# EAGLE board stm32f405rgt6 v75 (EAGLE 9.7.0)
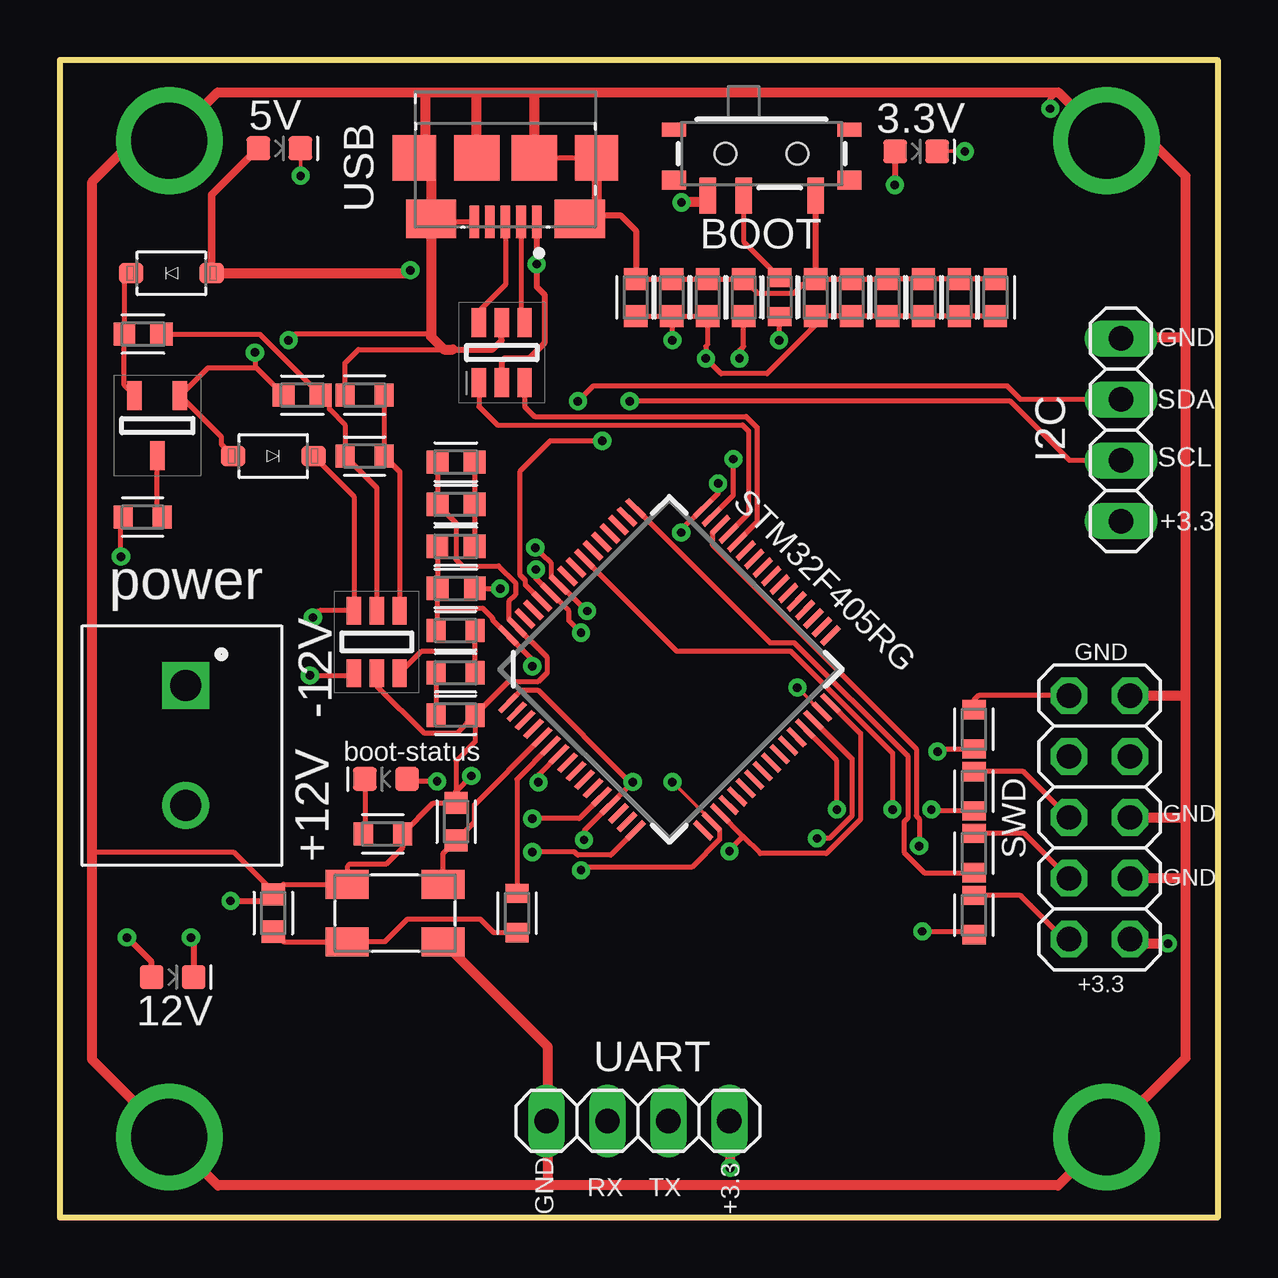
[diagram p0: board, top side]
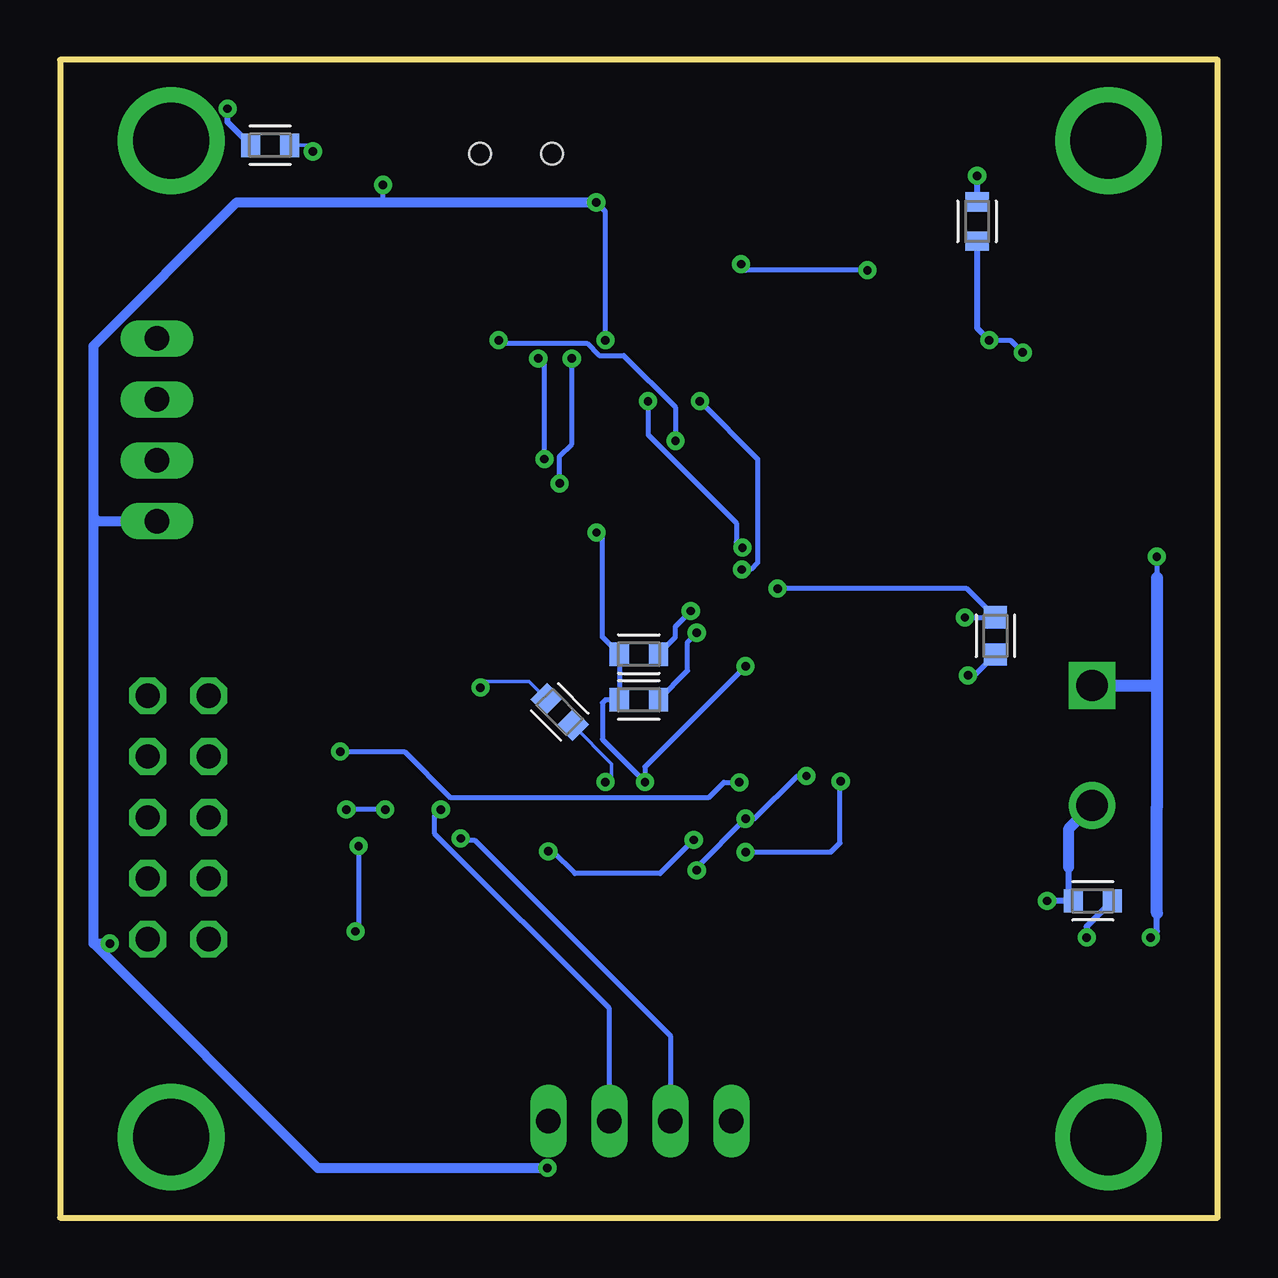
[diagram p1: board, bottom side, seen from below]

Size 48.26 x 48.26 mm. Coordinates in mm from the lower left corner, seen from the top.
Outline: 0,0 0,48.26 48.26,48.26 48.26,0 0,0
Copper layers (1*16): Top 0.035mm / dielectric 1.5mm / Bottom 0.035mm
Design rules "default *": minimum track width 6mil, minimum drill 0.35mm, track to track 6mil, track to pad 6mil, pad to pad 6mil, via to via 6mil, smd to smd 6mil, copper to edge 20mil, drill to drill 6mil, minimum pad ring 10mil, minimum via ring 8mil, stop-mask expansion 4mil, vias tented up to drill 0mil, thermal gap 10mil

## Footprints (pad centres in the part's own frame; a part is rotated, then mirrored left to right if it is on the bottom)
CAPC1608X85 = smd 0.921 x 0.97: 1 -0.775,0; 2 0.775,0
LED-0603 = smd 1 x 1: A -0.877,0; C 0.877,0
SOD-123 = smd 1.02 x 0.86: A 1.68,0; C -1.68,0
FUSC1608X60N = smd 0.799 x 0.974: 1 -0.815,0; 2 0.815,0
BEADC1608X95N = smd 0.9 x 0.97: 1 -0.785,0 | smd 0.933 x 0.97: 2 0.769,0
SOT95P280X100-6N = smd 1.15 x 0.6: 1 -1.3,0.95; 2 -1.3,0; 3 -1.3,-0.95; 4 1.3,-0.95; 5 1.3,0; 6 1.3,0.95
SOT95P280X145-6N = smd 1.2 x 0.6: 1 -1.25,0.95; 2 -1.25,0; 3 -1.25,-0.95; 4 1.25,-0.95; 5 1.25,0; 6 1.25,0.95
PHOENIX_1935161 = drill 1.3 square: 1 -2.5,0 | drill 1.3: 2 2.5,0
AMPHENOL_10118192-0001LF = smd 0.4 x 1.35: 1 -1.3,0; 2 -0.65,0; 3 0,0; 4 0.65,0; 5 1.3,0 | smd 2.1 x 1.6: SH1 -3.1,-0.125; SH2 3.1,-0.125 | smd 1.8 x 1.9: SH3 -3.8,-2.675; SH6 3.8,-2.675 | smd 1.9 x 1.9: SH4 -1.2,-2.675; SH5 1.2,-2.675
2X05 = drill 1.016 octagon: 1 -5.08,-1.27; 2 -5.08,1.27; 3 -2.54,-1.27; 4 -2.54,1.27; 5 0,-1.27; 6 0,1.27; 7 2.54,-1.27; 8 2.54,1.27; 9 5.08,-1.27; 10 5.08,1.27
1X04 = drill 1.016 long: 1 -3.81,0; 2 -1.27,0; 3 1.27,0; 4 3.81,0
INDC1608X95N = smd 0.9 x 0.97: 1 -0.785,0 | smd 0.933 x 0.97: 2 0.769,0
BEAGLEBONEBLACK_MOUNTING_HOLE = drill 3.175 pad 4.445: P$1 0,0
SOT95P280X125-3N = smd 1.2 x 0.6: 1 -1.25,0.95; 2 -1.25,-0.95; 3 1.25,0
RESC1608X60 = smd 0.799 x 0.974: 1 -0.815,0; 2 0.815,0
SWITCH_SPST_SMD_A = smd 0.7 x 1.5: 1 -2.25,-1.75; 2 -0.75,-1.75; 3 2.25,-1.75 | smd 1 x 0.6: GND1 -3.65,1; GND3 3.65,1 | smd 1 x 0.8: GND2 -3.65,-1.1; GND4 3.65,-1.1 | hole 0.9: -1.5,0; 1.5,0
TQFP64 = smd 0.22 x 1: 1 -3.75,-5.75; 2 -3.25,-5.75; 3 -2.75,-5.75; 4 -2.25,-5.75; 5 -1.75,-5.75; 6 -1.25,-5.75; 7 -0.75,-5.75; 8 -0.25,-5.75; 9 0.25,-5.75; 10 0.75,-5.75; 11 1.25,-5.75; 12 1.75,-5.75; 13 2.25,-5.75; 14 2.75,-5.75; 15 3.25,-5.75; 16 3.75,-5.75; 33 3.75,5.75; 34 3.25,5.75; 35 2.75,5.75; 36 2.25,5.75; 37 1.75,5.75; 38 1.25,5.75; 39 0.75,5.75; 40 0.25,5.75; 41 -0.25,5.75; 42 -0.75,5.75; 43 -1.25,5.75; 44 -1.75,5.75; 45 -2.25,5.75; 46 -2.75,5.75; 47 -3.25,5.75; 48 -3.75,5.75 | smd 1 x 0.22: 17 5.75,-3.75; 18 5.75,-3.25; 19 5.75,-2.75; 20 5.75,-2.25; 21 5.75,-1.75; 22 5.75,-1.25; 23 5.75,-0.75; 24 5.75,-0.25; 25 5.75,0.25; 26 5.75,0.75; 27 5.75,1.25; 28 5.75,1.75; 29 5.75,2.25; 30 5.75,2.75; 31 5.75,3.25; 32 5.75,3.75; 49 -5.75,3.75; 50 -5.75,3.25; 51 -5.75,2.75; 52 -5.75,2.25; 53 -5.75,1.75; 54 -5.75,1.25; 55 -5.75,0.75; 56 -5.75,0.25; 57 -5.75,-0.25; 58 -5.75,-0.75; 59 -5.75,-1.25; 60 -5.75,-1.75; 61 -5.75,-2.25; 62 -5.75,-2.75; 63 -5.75,-3.25; 64 -5.75,-3.75
ABM3B-16.000MHZ-B2-T = smd 1.8 x 1.2: 1 -2,-1.2; 2 2,-1.2; 3 2,1.2; 4 -2,1.2

## Placement (x,y rotation side)
C1  [CAPC1608X85]  27.43,21.08 315 bottom
C2  [CAPC1608X85]  28.5,38.35 90 top
C3  [CAPC1608X85]  34.49,38.35 90 top
C4  [CAPC1608X85]  35.99,38.35 90 top
C5  [CAPC1608X85]  37.49,38.35 90 top
C6  [CAPC1608X85]  38.99,38.35 90 top
C7  [CAPC1608X85]  27,38.35 90 top
C8  [CAPC1608X85]  31.5,38.35 90 top
C9  [CAPC1608X85]  16.51,31.5 180 top
C10  [CAPC1608X85]  16.51,29.74 180 top
C11  [CAPC1608X85]  16.51,16.51 90 top
C12  [CAPC1608X85]  8.89,12.7 90 top
C13  [CAPC1608X85]  10.1,34.29 180 top
C14  [CAPC1608X85]  9.27,24.26 90 bottom
C15  [CAPC1608X85]  24,38.35 90 top
C16  [CAPC1608X85]  25.5,38.35 90 top
C17  [CAPC1608X85]  33,38.35 90 top
D1  [LED-0603]  13.59,18.29 180 top
D2  [SOD-123]  8.89,31.75 180 top
D3  [SOD-123]  4.65,39.37 0 top
D4  [LED-0603]  4.7,10.03 0 top
D5  [LED-0603]  35.69,44.45 0 top
D6  [LED-0603]  9.14,44.58 0 top
F1  [FUSC1608X60N]  3.45,29.21 180 top
FB1  [BEADC1608X95N]  3.47,36.83 0 top
IC1  [SOT95P280X100-6N]  13.21,24 90 top
IC2  [SOT95P280X145-6N]  18.41,36.07 270 top
J1  1935161  [PHOENIX_1935161]  5.24,19.69 270 top
J3  [AMPHENOL_10118192-0001LF]  18.57,41.51 180 top
JP1  [2X05]  43.33,16.69 90 top
JP2  [1X04]  24.09,4.04 180 top
JP3  [1X04]  44.22,32.84 90 top
L1  [INDC1608X95N]  16.51,27.98 0 top
L2  [INDC1608X95N]  16.51,26.23 180 top
MGT1  [BEAGLEBONEBLACK_MOUNTING_HOLE]  43.62,44.89 0 top
MGT2  [BEAGLEBONEBLACK_MOUNTING_HOLE]  43.62,3.37 0 top
MGT3  [BEAGLEBONEBLACK_MOUNTING_HOLE]  4.56,3.37 0 top
MGT4  [BEAGLEBONEBLACK_MOUNTING_HOLE]  4.56,44.89 0 top
Q1  [SOT95P280X125-3N]  4.06,33.02 270 top
R1  [RESC1608X60]  30,38.37 90 top
R2  [RESC1608X60]  19.05,12.7 90 top
R3  1k  [RESC1608X60]  13.46,16 180 top
R4  [RESC1608X60]  12.7,31.75 180 top
R5  [RESC1608X60]  12.7,34.29 0 top
R6  [RESC1608X60]  16.49,24.48 180 top
R7  [RESC1608X60]  16.49,22.72 0 top
R8  [RESC1608X60]  16.49,20.95 180 top
R9  [RESC1608X60]  24.13,21.59 180 bottom
R10  [RESC1608X60]  24.13,23.5 180 bottom
R11  [RESC1608X60]  38.1,12.62 270 top
R12  [RESC1608X60]  38.1,15.2 270 top
R13  [RESC1608X60]  38.1,17.78 270 top
R14  [RESC1608X60]  38.1,20.36 270 top
R15  1k  [RESC1608X60]  5.21,13.21 0 bottom
R16  1k  [RESC1608X60]  39.5,44.7 0 bottom
R17  1k  [RESC1608X60]  10.03,41.53 90 bottom
S1  [SWITCH_SPST_SMD_A]  29.25,44.36 0 top
U$1  [TQFP64]  25.4,22.86 315 top
X1  [ABM3B-16.000MHZ-B2-T]  13.97,12.7 180 top

## Library data of the parts
C1-C17 = Capacitor; CATEGORY: Capacitor
D1 D4-D6 = SparkFun-LED
D2 D3 = Diodes; CREATED_BY: PCBLayout.com; DIGIKEY_PART_NUMBER: MBR0520LT1GOSTR-ND; MANUFACTURER: ON Semiconductor; MPN: MBR0520LT1G; PACKAGE: SOD-123
F1 = Circuit-Protection; CATEGORY: Circuit-Protection; SUB-CATEGORY: Fuse
FB1 = Filter; CATEGORY: Filter; SUB-CATEGORY: Ferrite bead
IC1 = MP2359DJ-LF-Z; DESCRIPTION: Voltage Regulators - Switching Regulators 1A 24V 1.4MHz Non-sync Buck; HEIGHT: 1mm; MANUFACTURER_NAME: Monolithic Power Systems (MPS); MANUFACTURER_PART_NUMBER: MP2359DJ-LF-Z; MOUSER_PART_NUMBER: 946-MP2359DJLFZ; MOUSER_PRICE-STOCK: https://www.mouser.co.uk/ProductDetail/Monolithic-Power-Systems-MPS/MP2359DJ-LF-Z?qs=rC7bBWoQAAkgAaURxgQSyA%3D%3D
IC2 = USBLC6-2SC6; ARROW_PART_NUMBER: USBLC6-2SC6; ARROW_PRICE-STOCK: https://www.arrow.com/en/products/usblc6-2sc6/stmicroelectronics; DESCRIPTION: TVS Diode Array Uni-Directional USBLC6-2SC6 17V, SOT-23 6-Pin; HEIGHT: 1.45mm; MANUFACTURER_NAME: STMicroelectronics; MANUFACTURER_PART_NUMBER: USBLC6-2SC6; MOUSER_PART_NUMBER: 511-USBLC6-2SC6; MOUSER_PRICE-STOCK: https://www.mouser.co.uk/ProductDetail/STMicroelectronics/USBLC6-2SC6?qs=po45yt2pPpu%2FhNIlwQdTlg%3D%3D
J1 = phoenix; MANUFACTURER: Phoenix Contact
J3 = USB-micro; MANUFACTURER: Amphenol; PARTREV: B; STANDARD: Manufacturer Recommendation
JP1-JP3 = Connector; CATEGORY: CONNECTOR; SUB-CATEGORY: PIN-HEADER
L1 L2 = Inductor; CATEGORY: Inductor; SUB-CATEGORY: Fixed
MGT1-MGT4 = BeagleBone_Black_Wireless
Q1 = AO3401A; ARROW_PART_NUMBER: AO3401A; ARROW_PRICE-STOCK: https://www.arrow.com/en/products/ao3401a/alpha-and-omega-semiconductor; DESCRIPTION: 30V P-Channel MOSFET; HEIGHT: 1.25mm; MANUFACTURER_NAME: Alpha & Omega Semiconductors; MANUFACTURER_PART_NUMBER: AO3401A
R1-R17 = Resistor; CATEGORY: Resistor; SUB-CATEGORY: Fixed
S1 = One_Dimensional_Pong; PROD_ID: SWCH-10651; SF_ID: COM-00597; SF_SKU: COM-10860
U$1 = SparkFun-IC-Microcontroller; PROD_ID: IC-11709; SPICEPREFIX: X
X1 = Crystals_Oscillators; CREATED_BY: PCBLayout.com; DIGIKEY_PART_NUMBER: 535-9122-2-ND; MANUFACTURER: Abracon LLC; MPN: ABM3B-16.000MHZ-B2-T; PACKAGE: SMD 4

## Nets
+3.3V: C3.1 C4.1 C5.1 C6.1 C7.1 C8.1 C15.1 C16.1 C17.1 D5.A JP1.1 JP2.1 JP3.1 L1.1 L2.2 R6.2 R9.2 R10.2 S1.1 U$1.1 U$1.13 U$1.19 U$1.32 U$1.48 U$1.64
+5V: D3.A D6.A IC2.5 J3.1
+12V: D4.A F1.2 J1.1
BOOT0: R1.1 U$1.60
BOOT1: U$1.28
BUCK_BST: C14.1 IC1.1
BUCK_EN: IC1.4 R4.1 R5.2
BUCK_FB: IC1.3 R6.1 R7.2
BUCK_IN: C13.1 FB1.2 IC1.5 R4.2
BUCK_SW: C14.2 D2.C IC1.6 L2.1
CONN_N: IC2.1 J3.2
CONN_P: IC2.3 J3.3
GND: C1.2 C2.2 C3.2 C4.2 C5.2 C6.2 C7.2 C8.2 C9.2 C10.2 C11.2 C12.2 C13.2 C15.2 C16.2 C17.2 D2.A IC1.2 IC2.2 J1.2 J3.5 J3.SH1 J3.SH2 J3.SH3 J3.SH4 J3.SH5 J3.SH6 JP1.3 JP1.5 JP1.9 JP2.4 JP3.4 MGT1.P$1 MGT2.P$1 MGT3.P$1 MGT4.P$1 Q1.1 R3.1 R5.1 R8.1 R15.1 R16.1 R17.1 S1.3 U$1.12 U$1.18 U$1.63 X1.2 X1.4
HSE_IN: C11.1 U$1.5 X1.1
HSE_OUT: R2.2 U$1.6
I2C_SCL: JP3.2 R10.1 U$1.58
I2C_SDA: JP3.3 R9.1 U$1.59
LED_STATUS: D1.A U$1.16
N$1: R1.2 S1.2
N$2: U$1.3
N$3: U$1.4
N$4: C12.1 R2.1 X1.3
N$5: D1.C R3.2
N$6: U$1.43
N$7: C9.1 C10.1 L1.2
N$8: D3.C FB1.1 Q1.2
N$9: F1.1 Q1.3
N$10: JP1.2 R11.1
N$11: U$1.38
N$12: U$1.42
N$13: U$1.41
N$14: U$1.40
N$15: U$1.39
N$16: U$1.34
N$18: U$1.37
N$19: U$1.36
N$20: U$1.35
N$21: U$1.33
N$22: R7.1 R8.2
N$23: U$1.62
N$24: U$1.61
N$25: JP1.4 R12.1
N$26: JP1.6 R13.1
N$27: U$1.53
N$28: U$1.57
N$29: U$1.56
N$30: JP1.10 R14.1
N$31: U$1.54
N$32: D4.C R15.2
N$34: U$1.52
N$35: U$1.51
N$36: U$1.50
N$37: U$1.2
N$38: U$1.10
N$39: U$1.8
N$40: U$1.9
N$41: U$1.11
N$42: D5.C R16.2
N$43: D6.C R17.2
N$46: U$1.26
N$47: U$1.27
N$48: U$1.25
N$49: U$1.23
N$50: U$1.24
N$51: U$1.22
N$52: U$1.20
N$53: U$1.21
N$54: U$1.17
N$55: U$1.15
N$57: U$1.14
NRST: R14.2 U$1.7
SWCLK: R12.2 U$1.49
SWDIO: R11.2 U$1.46
SWO: R13.2 U$1.55
USB_N: IC2.6 U$1.44
USB_P: IC2.4 U$1.45
USBRT3_RX: JP2.3 U$1.30
USBRT3_TX: JP2.2 U$1.29
VCAP1: C1.1 U$1.31
VCAP2: C2.1 U$1.47

## Tracks (layer width: path | path; a pad name or v marks a point on that pad's centre or on a via)
+3.3V  (via drill 0.35)
  Top 0.203: v27.43,30.61 27.43,30.2 U$1.48 25.89,28.66 v25.89,28.56 | C6.1 C5.1 C4.1 C3.1 C17.1 C8.1 31.5,37.21 29.48,35.19 27.56,35.19 v26.92,35.82 26.92,36.32 27,36.4 C7.1 C16.1 | C15.1 C16.1 | C16.1 25.5,36.6 v25.53,36.58 | 15.74,25.4 15.74,24.54 R6.2 | 15.74,25.4 L2.2 15.74,27.97 L1.1 | U$1.1 19.21,21.97 19.94,21.97 23.75,18.16 v23.88,18.16 U$1.13 21.84,16.12 v21.84,15.75 | 28.47,15.9 U$1.19 | v27.91,15.27 27.91,15.33 28.47,15.9 | 15.74,25.4 17.63,25.4 18.03,24.99 18.03,24.92 U$1.64 19.68,23.27 v19.68,22.99 | 28.47,15.9 29.19,15.18 31.95,15.18 33.37,16.61 33.37,20.19 U$1.32
  Top 0.254: D5.A 34.8,44.44 v34.8,43.05
  Top 0.406: v25.91,42.32 26.72,42.32 S1.1 | v27.94,2.08 27.94,4 JP2.1 | v46.18,11.43 44.78,11.43 JP1.1
  Bottom 0.203: v27.43,30.61 27.43,31.75 26.92,32.26 v26.92,35.82 | v25.53,36.58 25.53,41.94 v25.91,42.32 | v25.89,28.56 25.65,28.32 25.65,24.2 R10.2 R9.2 25.53,21.59 25.65,21.46 25.65,19.94 v23.88,18.16 23.88,18.8 v19.68,22.99 | v21.84,15.75 23.24,14.35 26.8,14.35 27.72,15.27 v27.91,15.27 | 34.89,42.32 34.8,42.42 v34.8,43.05
  Bottom 0.406: 46.86,11.43 46.86,29.21 | 46.86,29.21 46.68,29.03 JP3.1 | 46.86,11.43 v46.18,11.43 | 46.86,11.43 37.51,2.08 v27.94,2.08 | 46.86,29.21 46.86,36.35 40.89,42.32 34.89,42.32 v25.91,42.32
+5V  (via drill 0.35)
  Top 0.254: J3.1 v19.87,39.75 19.87,38.81 20.19,38.48 20.19,36.45 19.56,35.81 18.54,35.81 18.41,35.69 IC2.5
  Top 0.305: D6.A 6.33,42.64 D3.A
  Top 0.406: v14.61,39.5 14.48,39.37 D3.A
  Bottom 0.203: v14.61,39.5 19.68,39.5 19.87,39.68 v19.87,39.75
+12V  (via drill 0.35)
  Top 0.203: v2.54,27.56 2.54,29.12 F1.2
  Top 0.254: D4.A 3.82,10.66 v2.79,11.68
  Bottom 0.203: v2.54,27.56 2.54,26.67
  Bottom 0.254: v2.79,11.68 2.54,11.94 2.54,12.7
  Bottom 0.508: 2.54,12.7 2.54,17.14 2.54,22.23 | 2.54,26.67 2.54,22.23 | J1.1 2.58,22.19 2.54,22.23
BOOT0  (via drill 0.35)
  Top 0.203: v29.97,36.58 30,36.6 R1.1 | v22.6,32.39 v22.6,32.38 20.45,32.38 19.18,31.12 19.18,26.79 19.4,26.56 19.4,26.38 U$1.60
  Bottom 0.203: v22.6,32.39 v22.61,32.39 22.61,33.79 24.76,35.94 25.79,35.94 26.29,36.45 29.84,36.45 v29.97,36.58
BUCK_BST  (via drill 0.35)
  Top 0.203: v10.41,22.61 12.16,22.61 IC1.1
  Bottom 0.203: C14.1 10.15,22.61 v10.41,22.61
BUCK_EN
  Top 0.203: R5.2 R4.1 14.16,31.11 IC1.4
BUCK_FB
  Top 0.203: R7.2 17.3,23.62 | 17.3,23.62 R6.1 | IC1.3 15.08,23.62 17.3,23.62
BUCK_IN
  Top 0.203: IC1.5 13.21,30.43 R4.2 11.88,33.04 11.23,33.7 11.23,33.93 C13.1 8.33,36.83 FB1.2
BUCK_SW  (via drill 0.35)
  Top 0.203: D2.C 12.26,30.06 IC1.6 10.83,25.3 v10.54,25.02 | L2.1 18.34,26.23 v18.35,26.22
  Bottom 0.203: v10.54,25.02 9.28,25.02 C14.2 10.46,26.22 v18.35,26.22
CONN_N
  Top 0.203: J3.2 19.22,37.47 IC2.1
CONN_P
  Top 0.203: J3.3 18.57,38.89 17.46,37.79 IC2.3
GND  (via drill 0.35)
  Top 0.152: v25.53,18.16 27.17,16.52 U$1.18 | 41.27,46.58 41.6,46.91
  Top 0.203: C15.2 C16.2 C7.2 C2.2 29.09,38.54 30.59,38.54 30.95,38.9 31.27,38.9 C8.2 C17.2 C3.2 C4.2 C5.2 C6.2 | J3.5 15.59,41.51 J3.SH2 | C9.2 C10.2 16.51,28.96 16.51,27.44 16.78,27.18 18.29,27.18 18.98,26.48 18.98,25.96 18.7,25.68 18.7,24.96 U$1.63 20.32,23.35 20.32,22.73 19.95,22.36 18.7,22.36 R8.1 | IC1.2 13.21,22.18 15.17,20.21 16.56,20.21 R8.1 | 8.18,35.43 C13.2 | D2.A 6.73,32.23 6.73,32.55 Q1.1 6.17,35.43 8.18,35.43 | R5.1 11.88,35.63 12.45,36.2 16,36.2 | R8.1 17.3,19.84 16.51,19.05 C11.2 | C12.2 8.95,13.53 | 8.95,13.53 9.32,13.9 X1.2 11.97,14.64 12.07,14.73 13.59,14.73 14.28,15.42 R3.1 15.56,17.28 C11.2 | 1.35,15.24 7.24,15.24 8.95,13.53 | U$1.12 21.65,16.64 v19.68,16.64 | v17.14,18.41 16.51,17.78 C11.2 | U$1.18 27.5,16.16 27.5,15.76 26.34,14.6 21.84,14.6 v21.72,14.48 | 15.47,36.83 9.78,36.83 v9.53,36.58 | v8.13,36.07 8.13,35.48 8.18,35.43 | J3.SH4 J3.SH3
  Top 0.254: 16.38,36.2 18.03,36.2 18.41,36.58 IC2.2 | S1.3 C8.2 | J3.SH1 21.82,41.78 23.37,41.78 24,41.15 C15.2 | v41.27,46.23 41.27,46.58 | v7.11,13.21 8.62,13.21 C12.2
  Top 0.406: 46.91,36.7 46.91,43.43 45.45,44.89 MGT1.P$1 41.6,46.91 19.81,46.91 | 46.91,36.7 46.91,21.72 | 46.91,21.72 46.91,16.51 | 46.91,16.51 46.91,14.1 | 20.32,1.35 6.58,1.35 MGT3.P$1 1.35,6.58 1.35,15.24 1.35,43.18 3.06,44.89 MGT4.P$1 6.58,46.91 15.24,46.91 | 15.24,46.91 17.27,46.91 | 17.27,46.91 19.81,46.91 | JP2.4 20.32,4 | 20.32,4 20.32,1.35 | X1.4 20.32,7.15 20.32,4 | JP3.4 44.27,36.7 46.91,36.7 | JP1.9 46.86,21.77 46.91,21.72 | JP1.3 46.86,14.15 46.91,14.1 | JP1.5 46.74,16.69 46.91,16.51 | 15.24,46.91 15.24,44.65 J3.SH6 15.47,43.48 J3.SH2 15.47,36.83 15.47,36.73 16,36.2 16.38,36.2 | J3.SH5 17.37,46.82 17.27,46.91 | J3.SH3 22.37,42.33 J3.SH1 | J3.SH4 19.77,46.87 19.81,46.91 | 20.32,1.35 41.6,1.35 MGT2.P$1 46.91,6.65 46.91,14.1
  Bottom 0.152: C1.2 25.27,18.92 25.27,18.41 v25.53,18.16
  Bottom 0.203: v17.14,18.41 17.53,18.41 19.3,16.64 v19.68,16.64 21.72,14.6 v21.72,14.48 | v9.53,36.58 8.64,36.58 v8.13,36.07
  Bottom 0.254: R17.1 10.03,37.08 v9.53,36.58 | R16.1 41.27,45.67 v41.27,46.23 | v7.11,13.21 R15.1 6.22,13.41 6.22,14.6
  Bottom 0.457: J1.2 6.22,16.2 6.22,14.6
HSE_IN
  Top 0.203: X1.1 15.97,15.19 C11.1 17.27,16.5 17.27,17.21 U$1.5
HSE_OUT
  Top 0.203: U$1.6 19.05,18.28 R2.2
I2C_SCL  (via drill 0.35)
  Top 0.203: v21.97,25.29 21.95,25.29 20.85,26.4 U$1.58 20.47,26.73 20.47,27.28 20.1,27.65 20.09,27.65 v19.81,27.93 | JP3.2 42.09,31.57 39.62,34.04 v23.75,34.04
  Bottom 0.203: R10.1 22.61,24.2 22.61,24.64 21.97,25.27 v21.97,25.29 | v23.75,34.04 23.75,32.64 20.07,28.96 20.07,28.19 v19.81,27.93
I2C_SDA  (via drill 0.35)
  Top 0.203: v21.72,24.38 21.21,24.89 21.21,25.28 U$1.59 19.84,26.64 v19.84,27.02 | JP3.3 40.05,34.11 39.49,34.67 22.22,34.67 v21.59,34.04
  Bottom 0.203: R9.1 22.1,22.81 22.1,24 v21.72,24.38 | v21.59,34.04 19.18,31.63 19.18,27.3 19.46,27.02 v19.84,27.02
LED_STATUS  (via drill 0.35)
  Top 0.203: v19.68,15.24 21.46,15.24 21.58,15.12 22.96,15.12 U$1.16 | v15.72,18.19 14.56,18.19 D1.A
  Bottom 0.203: v19.68,15.24 16.13,15.24 15.75,15.62 15.75,18.16 v15.72,18.19
N$1
  Top 0.203: S1.2 28.5,40.69 R1.2
N$4
  Top 0.203: C12.1 9.32,11.5 X1.3 13.53,11.5 14.48,12.45 17.53,12.45 18.09,11.88 R2.1
N$5
  Top 0.203: D1.C 12.71,16.07 R3.2
N$7
  Top 0.203: C9.1 C10.1 L1.2
N$8
  Top 0.203: Q1.2 2.68,34.7 FB1.1 2.68,39.09 D3.C
N$9
  Top 0.203: F1.1 4.06,29.41 Q1.3
N$10
  Top 0.203: R11.1 40.03,13.43 41.86,11.61 JP1.2
N$22
  Top 0.203: R7.1 R8.2
N$25
  Top 0.203: R12.1 40.2,16.01 JP1.4
N$26
  Top 0.203: JP1.6 40.15,18.59 R13.1
N$30
  Top 0.203: JP1.10 38.28,21.77 38.1,21.59 R14.1
N$32  (via drill 0.35)
  Top 0.254: v5.46,11.68 5.58,11.57 D4.C
  Bottom 0.254: R15.2 5.46,12.14 v5.46,11.68
N$42  (via drill 0.35)
  Top 0.152: D5.C v37.72,44.45
  Bottom 0.152: R16.2 37.97,44.7 v37.72,44.45
N$43  (via drill 0.35)
  Top 0.152: D6.C 10.02,43.45 v10.03,43.43
  Bottom 0.254: v10.03,43.43 R17.2
NRST  (via drill 0.35)
  Top 0.203: v36.58,19.43 36.69,19.55 R14.2 | U$1.7 19.94,18.46 v19.94,18.15
  Bottom 0.203: v19.94,18.15 20.59,18.15 21.21,17.53 32,17.53 33.9,19.43 v36.58,19.43
SWCLK
  Top 0.203: R12.2 36.03,14.38 35.18,15.23 35.18,16.51 35.33,16.66 35.33,19.25 30.6,23.98 29.59,23.98 U$1.49
SWDIO  (via drill 0.35)
  Top 0.203: v35.94,11.94 37.96,11.94 R11.2 | v35.81,15.49 35.81,16.63 35.69,16.76 35.69,19.55 27.19,28.05 27.19,28.54 U$1.46
  Bottom 0.203: v35.81,15.49 35.81,12.06 v35.94,11.94
SWO  (via drill 0.35)
  Top 0.203: v36.32,17.02 36.38,16.96 R13.2 | v34.7,17.02 34.7,19.38 30.46,23.62 25.7,23.62 U$1.55
  Bottom 0.203: v34.7,17.02 v36.32,17.02
USB_N
  Top 0.203: IC2.6 19.37,33.81 19.78,33.4 28.59,33.4 29.06,32.94 29.06,28.99 U$1.44 | U$1.44
USB_P
  Top 0.203: IC2.4 17.46,33.81 18.23,33.05 28.45,33.05 28.7,32.79 28.7,29.34 U$1.45 | U$1.45
USBRT3_RX  (via drill 0.35)
  Top 0.203: v31.56,15.81 32.07,15.81 33.02,16.76 33.02,19.13 U$1.30
  Bottom 0.203: JP2.3 22.82,7.58 30.99,15.75 31.49,15.75 v31.56,15.81
USBRT3_TX  (via drill 0.35)
  Top 0.203: v32.38,17.02 32.38,19.06 U$1.29
  Bottom 0.203: JP2.2 25.36,8.72 32.64,16 32.64,16.76 v32.38,17.02
VCAP1  (via drill 0.35)
  Top 0.152: v30.73,22.1 31.74,21.09 U$1.31
  Bottom 0.152: C1.1 28.7,22.35 30.48,22.35 v30.73,22.1
VCAP2  (via drill 0.35)
  Top 0.203: U$1.47 28.07,30.12 v28.07,31.62 | C2.1 28.5,36.32 28.32,36.15 v28.32,35.82
  Bottom 0.203: v28.07,31.62 28.07,35.56 v28.32,35.82

## Text on the board
tNames: 5V | 3.3V | USB | BOOT | GND | SDA | SCL | I2C | +3.3 | power | -12V | STM32F405RG | GND | +12V | boot-status | GND | SWD | GND | +3.3 | 12V | UART | RX | TX | GND | +3.3